# Altium PCB PCM2706 Bus Powered USB DAC 3.PcbDoc
Units mil, origin at the board's own origin, x right, y up, seen from the top; angles counter-clockwise.
Board outline 6000 x 4000 mil, 2 copper layers (Top Layer, Bottom Layer); 29 components, 21 nets, 103 pads, 0 vias.
Unrouted connection lines stored in the file: 3.
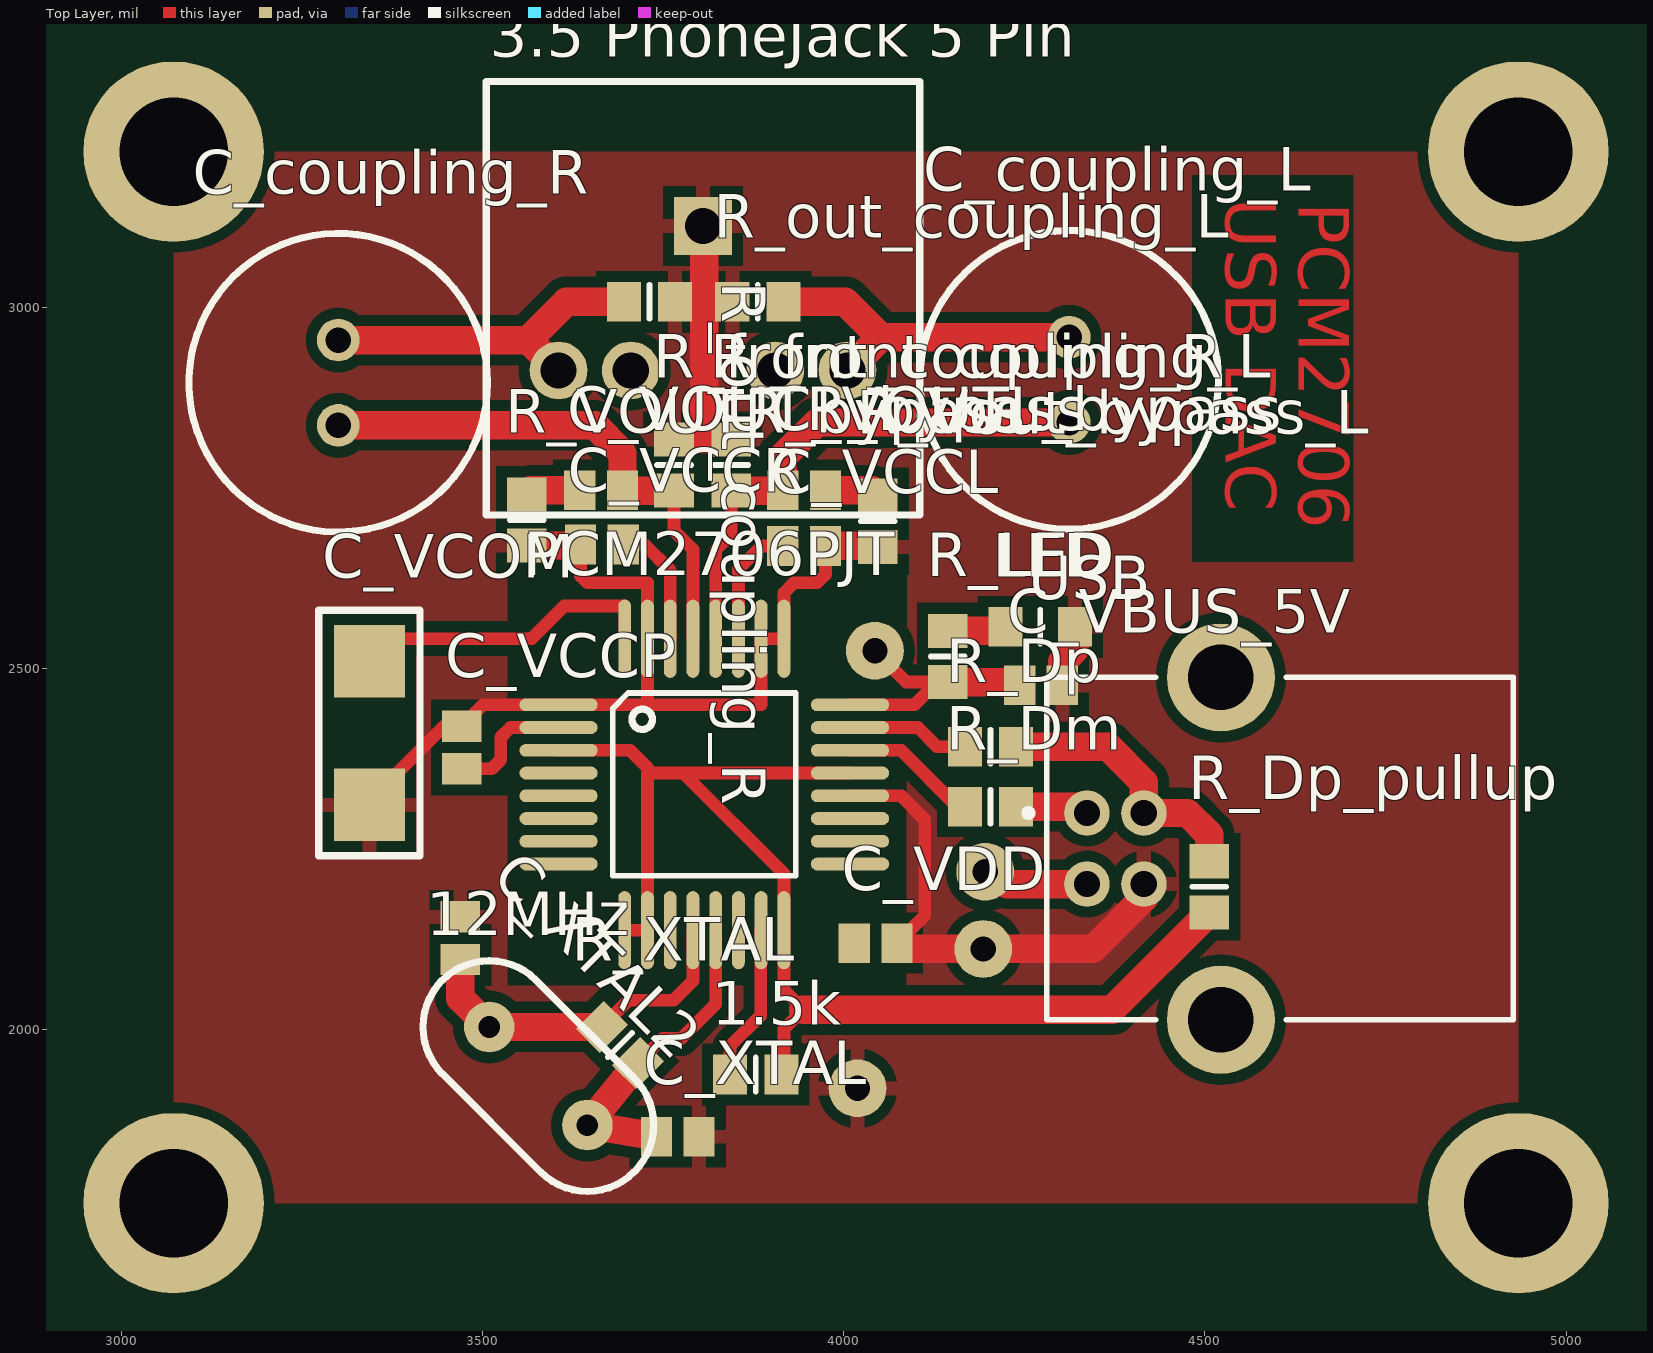
[diagram p0: Top Layer view]
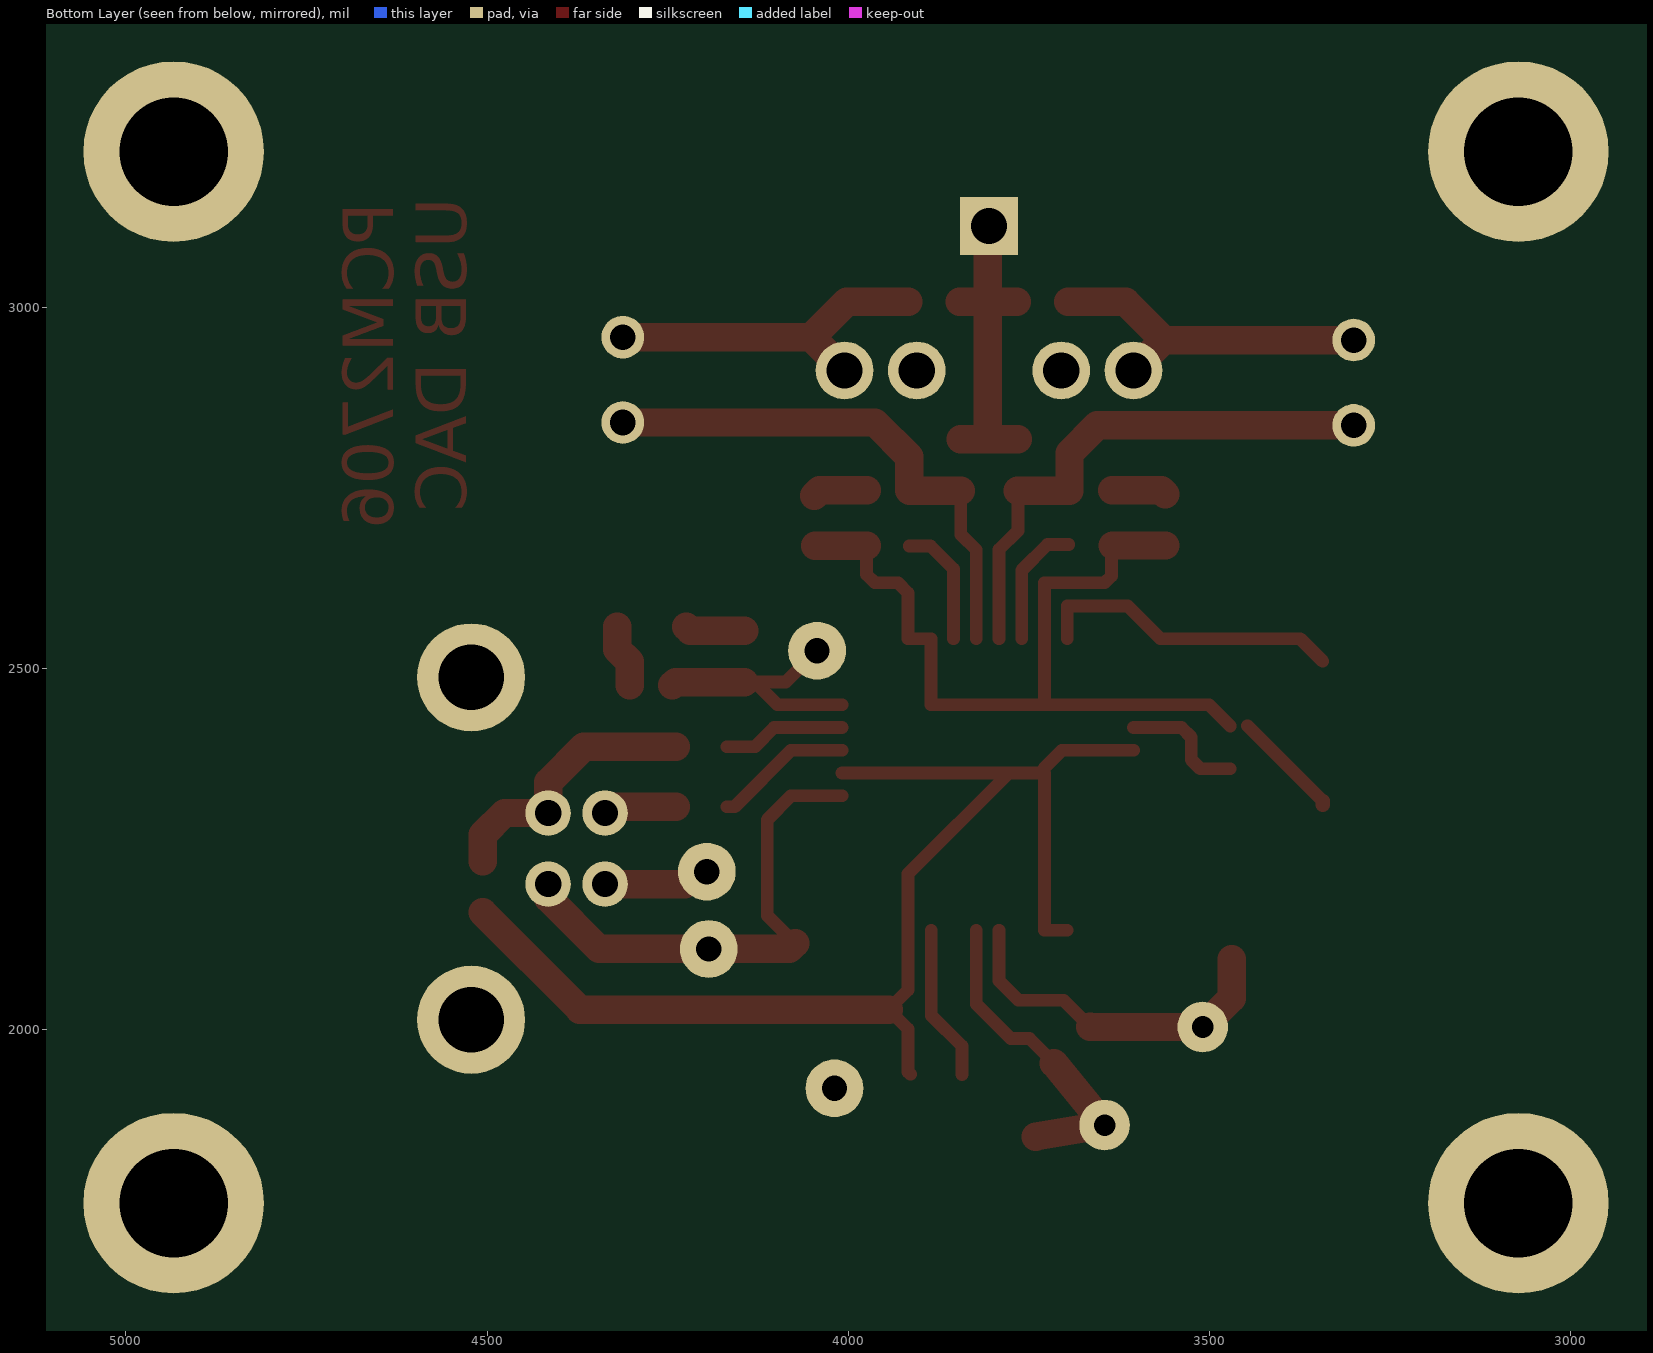
[diagram p1: Bottom Layer view, seen from below]

## Layer stack, top to bottom
Top Layer: signal copper 1.4
Dielectric: dielectric 12.6, FR-4, Dk 4.8
Bottom Layer: signal copper 1.4

## Board outline
1000,1000 7000,1000 7000,5000 1000,5000

## Design rules (kind name [scope] priority, off if disabled: settings)
Clearance [All] p1: gap=15
PolygonConnect [All] p1: connectstyle=Relief reliefconductorwidth=20 reliefentries=4 polygonreliefangle="90 Angle"
RoutingVias [All] p1: holewidth=28 width=50 viastyle="Through Hole" minholewidth=28 minwidth=50 maxholewidth=28 maxwidth=50
SilkscreenOverComponentPads [All] p1: minsilkscreentomaskgap=10
SolderMaskExpansion [All] p1: expansion=4
Width [All] p1: maxlimit=10 minlimit=10 preferedwidth=10
27 further rules are at their usual default settings.

## Components (designator, comment, footprint, x,y, rotation, side; value= is the part's Value field where it differs from the comment)
1.5k "R_DT_pullup" 6-0805_N 3878,1938 r180 top
"3.5 PhoneJack 5 Pin" "3.5 PhoneJack 5 Pin" "3.5 PhoneJack 5 Pin" 3805,3113 r90 top
12MHz "XTAL" "12MHz Crystal OSC through hole" 3577,1936 r315 top
C_coupling_L "Cap Pol1" RB5-10.5_narrowed 4312,2900 r90 top
C_coupling_R "Cap Pol1" RB5-10.5_narrowed 3300,2896 r90 top
C_VBUS_5V "" C0805 4273,2477 r0 top
C_VCCL "" C0805 3945,2670 r0 top
C_VCCP "" C0805 3471,2391 r90 top
C_VCCR "" C0805 3665,2672 r180 top
C_VCOM "" "Tantalum 6032-28 case C kemet" 3343,2411 r270 top
C_VDD "" C0805 4044,2120 r0 top
C_VOUTL_bypass "" C0805 3945,2747 r0 top
C_VOUTR_bypass "" C0805 3664,2747 r180 top
C_XTAL "" C0805 3770,1852 r0 top
C_XTAL2 "" C0805 3469,2127 r90 top
LED "" 6-0805_N_enlarge 4272,2558 r0 top
PCM2706PJT "PCM2706PJT" S-PQFP-N32-2mm-out 3605,2450 r0 top
R_Dm "22" 6-0805_N 4203,2309 r180 top
R_Dp "22" 6-0805_N 4203,2392 r180 top
R_Dp_pullup "1.5k" 6-0805_N 4506,2198 r90 top
R_front_coupling_L "3.3k" 6-0805_N 3844,2782 r270 top
R_front_coupling_R "3.3k" 6-0805_N 3765,2782 r270 top
R_LED "330" 6-0805_N 4144,2517 r90 top
R_out_coupling_L "3.3k" 6-0805_N 3881,3008 r0 top
R_out_coupling_R "3.3k" 6-0805_N 3731,3008 r180 top
R_Vout_bypass_L "16" 6-0805_N 4047,2704 r270 top
R_VOUTR_bypass "16" 6-0805_N 3561,2706 r90 top
R_XTAL "1M" 6-0805_N 3690,1979 r135 top
USB "USB B type" USB2.5-2H4D 4376,2251 r0 top

## Footprints (in the part's own frame and the unit in brackets; to place one, negate y for a bottom-side part, rotate by r counter-clockwise, add the part's x,y. Pads: shape width x height; smd on the part's side, far side on the other; paste and mask are expansions set on the pad)
"3.5 PhoneJack 5 Pin" [mil] "3.5 PhoneJack 5 Pin"
  rect 80x80 hole 50: COM(0,0)
  round 80 hole 50: L_NC(-200,-100) L_NO(-200,-200) R_NC(-200,100) R_NO(-200,200)
  silkscreen extent -400,-300 200,300
6-0805_N [mm] "Chip Resistor, Body 2.0x1.2mm, IPC Medium Density"
  rect 1.2x1.4 smd: 1(-0.9,0) 2(0.9,0)
  silkscreen extent 0,-0.6 0,0.6, body extent -1.07,-0.7 1.07,0.7, height 0.7
6-0805_N_enlarge [mm] "Chip Resistor, Body 2.0x1.2mm, IPC Medium Density"
  rect 1.2x1.4 smd: 1(-1.219,0) 2(1.219,0)
  silkscreen extent 0,-0.6 0,0.6, body extent -1.07,-0.7 1.07,0.7, height 0.7
"12MHz Crystal OSC through hole" [mil]
  round 70 hole 30: 1(-96.06,0) 2(96.06,0)
  silkscreen extent -188,-92 188,92
C0805 [mm] "Chip Capacitor, Body 2.0x1.3mm, IPC High Density"
  rect 1.1x1.4 smd: 1(-0.75,0) 2(0.75,0)
  body extent -1.1,-0.72 1.1,0.72, height 1.4
RB5-10.5_narrowed [mm] "Capacitor (Radial); 2 Leads"
  round 1.5 hole 0.9: 1(-1.5,0) 2(1.5,0)
  silkscreen extent -5.25,-5.25 5.25,5.25
S-PQFP-N32-2mm-out [mm]
  oval 2.75x0.45 smd: 1(0,0) 2(0,-0.8) 3(0,-1.6) 4(0,-2.4) 5(0,-3.2) 6(0,-4) 7(0,-4.8) 8(0,-5.6) 17(10.25,-5.6) 18(10.25,-4.8) 19(10.25,-4) 20(10.25,-3.2) 21(10.25,-2.4) 22(10.25,-1.6) 23(10.25,-0.8) 24(10.25,0)
  oval 0.45x2.75 smd: 9(2.325,-7.925) 10(3.125,-7.925) 11(3.925,-7.925) 12(4.725,-7.925) 13(5.525,-7.925) 14(6.325,-7.925) 15(7.125,-7.925) 16(7.925,-7.925) 25(7.925,2.325) 26(7.125,2.325) 27(6.325,2.325) 28(5.525,2.325) 29(4.725,2.325) 30(3.925,2.325) 31(3.125,2.325) 32(2.325,2.325)
  silkscreen extent 1.91,-6.02 8.34,0.42
"Tantalum 6032-28 case C kemet" [mm]
  rect 2.55x2.5 smd: 1(-2.525,0) 2(2.525,0)
  silkscreen extent -4.32,-1.78 4.32,1.78
USB2.5-2H4D [mm] "Connector; USB1.1, Type B, Thru-Hole; 4 Position; Right Angle"
  round 1.6 hole 0.92: 1(-1,1.25) 2(-1,-1.25) 3(1,-1.25) 4(1,1.25)
  round 3.8 hole 2.3: 5(3.71,6.02) 6(3.71,-6.02)
  silkscreen extent -3.18,-6.02 13.99,6.02, body extent -2.41,-6.02 13.99,6.02, height 11.1

## Part data
1.5k R_Dm R_Dp R_Dp_pullup R_front_coupling_L R_front_coupling_R R_LED R_out_coupling_L R_out_coupling_R R_Vout_bypass_L R_VOUTR_bypass R_XTAL: library part "Res Thermal", "Thermistor"
12MHz: "Crystal Oscillator"
C_coupling_L C_coupling_R: "Polarized Capacitor (Radial)"
C_VBUS_5V C_VCCL C_VCCP C_VCCR C_VCOM C_VDD C_VOUTL_bypass C_VOUTR_bypass C_XTAL C_XTAL2: library part "Cap Pol3", "Polarized Capacitor (Surface Mount)"
LED: library part LED2, "Typical RED, GREEN, YELLOW, AMBER GaAs LED"

## Free pads (board coordinates)
  round 80 hole 35: 1(4195.65,2219) 2(4043,2525) 6(4193,2112) 7(4019,1919)
  round 250 hole 150: out1(4934,1760) out2(4934,3216) out3(3072,3216) out4(3072,1760)

## Nets (pads, with @x,y where several pads share a name; then routed paths per layer and width w, separated by ;. In a path a pad name is that pad's centre, name@x,y a point inside that pad or via, vN(x,y) a via of type N, cw(c..) or ccw(c..) an arc to the next point about the centre after c; other vN are vias at no path point)
GND: "3.5 PhoneJack 5 Pin.COM" C_VBUS_5V.2 C_VCCL.2 C_VCCP.2 C_VCCR.2 C_VCOM.2 C_VDD.2 C_XTAL2.2 C_XTAL.2 LED.2 pad.6 pad.7 PCM2706PJT.1 PCM2706PJT.20 PCM2706PJT.25 PCM2706PJT.26 PCM2706PJT.31 R_front_coupling_L.1 R_front_coupling_R.1 R_out_coupling_L.1 R_out_coupling_R.1 R_Vout_bypass_L.2 R_VOUTR_bypass.1 USB.3 | length 2564.1
  Top Layer w17.72: C_VCOM.2@3343,2317 C_VCCP.2@3447,2421 ; C_VCCP.2 3500.47,2450 PCM2706PJT.1 3728.03,2450 ; C_VCCR.2 3635.47,2628.53 3645,2619 3728.03,2619 PCM2706PJT.31 3728.03,2450 ; C_VCCL.2 3974.53,2630.53 3963,2619 3931,2619 3917.01,2605.01 PCM2706PJT.25 PCM2706PJT.26 3885.51,2450 3728.03,2450 ; PCM2706PJT.20 4078.98,2324.02 4112,2291 4112,2158.47 C_VDD.2
  Top Layer w19.68: C_VCOM.2 C_VCOM.2@3343,2317
  Top Layer w39.37: R_VOUTR_bypass.1 C_VCCR.2@3634.04,2670.57 ; R_front_coupling_R.1 3807,2817.43 ; R_out_coupling_R.1 3807,3008 ; 3807,3111 3807,3008 ; R_front_coupling_L.1 3807,2817.43 ; R_out_coupling_L.1 3807,3008 ; C_VCCL.2 R_Vout_bypass_L.2@4045.57,2670 ; C_VDD.2 4081.53,2112 pad.6 4345,2112 4415.37,2182.37 USB.3 ; C_VBUS_5V.2 4302.53,2509.53 4320,2527 LED.2 ; 3807,2817.43 3807,3008
Net1.5k_2: 1.5k.2 PCM2706PJT.15 | length 217.8
  Top Layer w10: PCM2706PJT.15@3885,2137.48 PCM2706PJT.15
  Top Layer w17.72: 1.5k.2 3842.57,1977.57 3885,2020 PCM2706PJT.15@3885,2137.48
"Net3.5 PhoneJack 5 Pin_L_NO": "3.5 PhoneJack 5 Pin.L_NO" C_coupling_L.2 R_out_coupling_L.2 | length 481
  Top Layer w39.37: R_out_coupling_L.2 4002.11,3008 4051.06,2959.06 ; 4005,2913 4051.06,2959.06 ; C_coupling_L.2 4051.06,2959.06
"Net3.5 PhoneJack 5 Pin_R_NO": "3.5 PhoneJack 5 Pin.R_NO" C_coupling_R.2 R_out_coupling_R.2 | length 477
  Top Layer w39.37: C_coupling_R.2 3562.94,2955.06 ; 3605,2913 3562.94,2955.06 ; R_out_coupling_R.2 3615.89,3008 3562.94,2955.06
Net12MHz_1: 12MHz.1 C_XTAL2.1 PCM2706PJT.12 R_XTAL.2 | length 488.6
  Top Layer w17.72: R_XTAL.2 3701.89,2041 3764,2041 3791.02,2068.02 PCM2706PJT.12
  Top Layer w39.37: C_XTAL2.1 3469,2044 12MHz.1 R_XTAL.2
Net12MHz_2: 12MHz.2 C_XTAL.1 PCM2706PJT.13 R_XTAL.1 | length 451.5
  Top Layer w17.72: R_XTAL.1 3749.11,1988 3775,1988 3822.52,2035.52 PCM2706PJT.13
  Top Layer w39.37: R_XTAL.1 12MHz.2 C_XTAL.1
NetC_coupling_L_1: C_coupling_L.1 C_VOUTL_bypass.1 PCM2706PJT.28 R_front_coupling_L.2 | length 748.2
  Top Layer w17.72: PCM2706PJT.28 3822.52,2664.52 3844,2686 R_front_coupling_L.2
  Top Layer w39.37: R_front_coupling_L.2 3915.04,2746.57 C_VOUTL_bypass.1 3915.47,2793.47 3962.94,2840.94 C_coupling_L.1
NetC_coupling_R_1: C_coupling_R.1 C_VOUTR_bypass.1 PCM2706PJT.29 R_front_coupling_R.2 | length 747.8
  Top Layer w17.72: R_front_coupling_R.2 3765,2691 3791.02,2664.98 PCM2706PJT.29
  Top Layer w39.37: C_coupling_R.1 3655.06,2836.94 3693.53,2798.47 C_VOUTR_bypass.1 ; C_VOUTR_bypass.1@3693.96,2746.57 R_front_coupling_R.2
NetC_VBUS_5V_1: C_VBUS_5V.1 pad.1 pad.2 PCM2706PJT.24 R_LED.1 USB.2 | length 514.4
  Top Layer w17.72: PCM2706PJT.24 4098,2450 4129.57,2481.57 R_LED.1 4086.43,2481.57 pad.2
  Top Layer w39.37: R_LED.1 4238.91,2481.57 C_VBUS_5V.1 ; pad.1 4226.21,2201.79 USB.2
NetC_VCCL_1: C_VCCL.1 PCM2706PJT.27 | length 171.2
  Top Layer w17.72: PCM2706PJT.27 3854.02,2638.02 3886,2670 C_VCCL.1
NetC_VCCP_1: C_VCCP.1 PCM2706PJT.2 | length 175.8
  Top Layer w17.72: C_VCCP.1 3512.47,2361.47 3525,2374 3525,2405 3538.5,2418.5 PCM2706PJT.2
NetC_VCCR_1: C_VCCR.1 PCM2706PJT.30 | length 174.7
  Top Layer w17.72: C_VCCR.1 3724,2672 3759.53,2636.47 PCM2706PJT.30
NetC_VCOM_1: C_VCOM.1 PCM2706PJT.32 | length 430.7
  Top Layer w17.72: C_VCOM.1 3374.13,2541.54 3567.54,2541.54 3613,2587 3696.54,2587 PCM2706PJT.32
NetC_VOUTL_bypass_2: C_VOUTL_bypass.2 R_Vout_bypass_L.1 | length 75.6
  Top Layer w39.37: C_VOUTL_bypass.2 4039.43,2747 R_Vout_bypass_L.1
NetC_VOUTR_bypass_2: C_VOUTR_bypass.2 R_VOUTR_bypass.2 | length 75.8
  Top Layer w39.37: R_VOUTR_bypass.2 3566.57,2747 C_VOUTR_bypass.2
NetLED_1: LED.1 R_LED.2 | length 82.3
  Top Layer w39.37: R_LED.2 4218.43,2552.43 LED.1
NetPCM2706PJT_22: PCM2706PJT.22 R_Dm.2 | length 191.3
  Top Layer w17.72: PCM2706PJT.22 4078.99,2387.01 4157,2309 R_Dm.2
NetPCM2706PJT_23: PCM2706PJT.23 R_Dp.2 | length 170
  Top Layer w17.72: PCM2706PJT.23 4102.5,2418.5 4129,2392 R_Dp.2
NetR_Dm_1: R_Dm.1 USB.1 | length 101.8
  Top Layer w39.37: R_Dm.1 4327.84,2309 USB.1
NetR_Dp_1: R_Dp.1 R_Dp_pullup.2 USB.4 | length 379.5
  Top Layer w39.37: R_Dp.1 4366,2392 4415.37,2342.63 USB.4 4475.79,2300.21 4506,2270 R_Dp_pullup.2
VCC: 1.5k.1 C_VDD.1 PCM2706PJT.3 PCM2706PJT.9 PCM2706PJT.10 PCM2706PJT.16 PCM2706PJT.21 R_Dp_pullup.1 | length 1779.4
  Top Layer w10: 1.5k.1 1.5k.1@3913.86,1938.43
  Top Layer w17.72: PCM2706PJT.3 3703.99,2387.01 3728.03,2362.97 ; PCM2706PJT.9 PCM2706PJT.10 3728.03,2355.51 3777.49,2355.51 ; 1.5k.1@3913.86,1938.43 3917.01,1941.58 3917.01,2001.01 3944,2028 3917.01,2054.99 PCM2706PJT.16 3917.01,2215.99 3777.49,2355.51 ; PCM2706PJT.21 3777.49,2355.51
  Top Layer w39.37: 3944,2028 4371.43,2028 R_Dp_pullup.1
pads on no net: "3.5 PhoneJack 5 Pin.L_NC" "3.5 PhoneJack 5 Pin.R_NC" PCM2706PJT.4 PCM2706PJT.5 PCM2706PJT.6 PCM2706PJT.7 PCM2706PJT.8 PCM2706PJT.11 PCM2706PJT.14 PCM2706PJT.17 PCM2706PJT.18 PCM2706PJT.19 USB.5 USB.6

## Polygon pours and split planes (outlines as drawn)
GND on Top Layer "pour" (solid, pour order 4): 3072,3216 3072,1760 4934,1760 4934,3216

## Other copper
Top Layer:
  pour cut-out: 3428.44,2324.82 3428.44,2457.18 3513.56,2457.18 3502.06,2440.94 3530.39,2440.94 3535,2442.1 3535,2324.82
  pour cut-out: 4185.38,2600.56 4310,2600.56 4310,2517 4186,2517
  pour cut-out: 3407.21,2321.59 3278.79,2321.59 3278.79,2575.61 3407.21,2575.61
  pour cut-out: 3535,2632 4087,2632 4087,2061 3535,2062
  pour cut-out: 4482.5,3183 4482.5,2648 4705.5,2648 4705.5,3183
  text "USB DAC" at 4506,3152 h120 r270
  text "PCM2706" at 4607,3146 h120 r270